# EAGLE board tube_power-OLD (EAGLE 6.4)
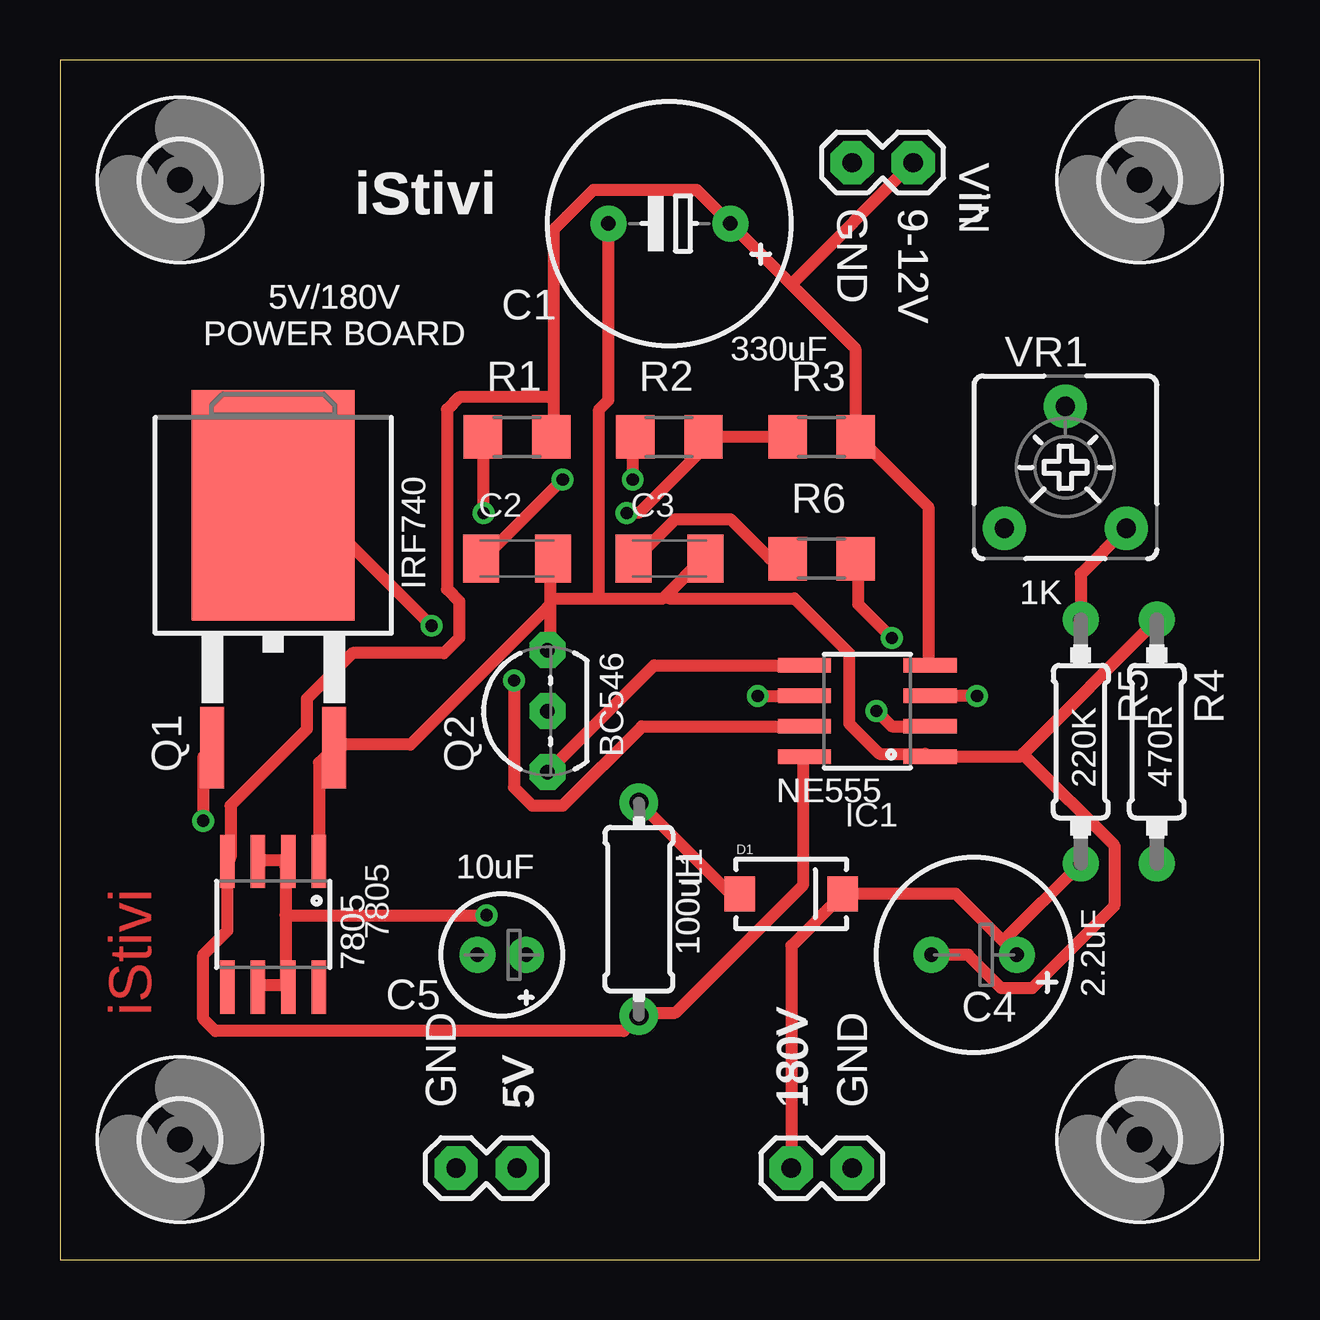
[diagram p0: board, top side]
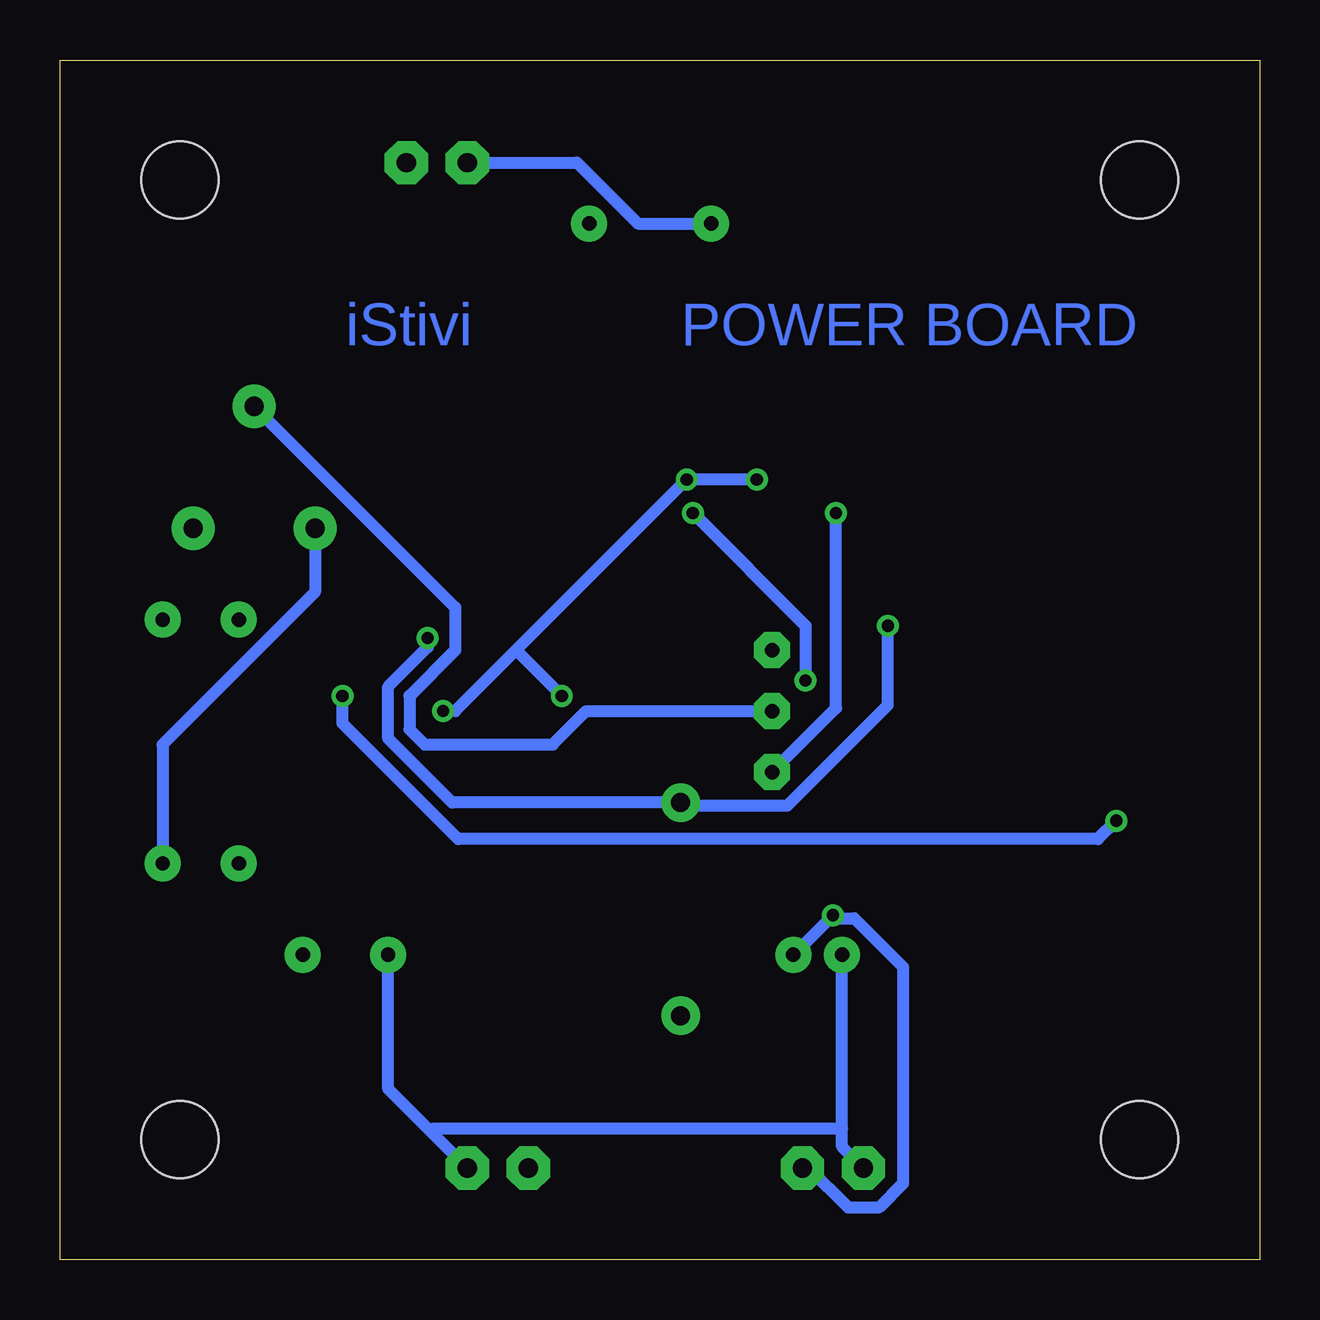
[diagram p1: board, bottom side, seen from below]

Size 50 x 50 mm. Coordinates in mm from the lower left corner, seen from the top.
Outline: 0,0 50,0 50,50 0,50 0,0
Copper layers (1*16): Top 0.035mm / dielectric 1.5mm / Bottom 0.035mm
Design rules "default *": minimum track width 20mil, minimum drill 20mil, track to track 15mil, track to pad 15mil, pad to pad 15mil, via to via 15mil, smd to smd 8mil, copper to edge 40mil, drill to drill 8mil, minimum pad ring 10mil, minimum via ring 8mil, stop-mask expansion 4mil, vias tented up to drill 0mil, thermal gap 10mil
Net classes: 1 ground: width 0.356 mm; 2 power: width 0.356 mm

## Footprints (pad centres in the part's own frame; a part is rotated, then mirrored left to right if it is on the bottom)
1X02 = drill 0.8 pad 1.8 octagon: 1 0,0; 2 2.54,0
SO08 = smd 0.61 x 2.21: 1 -1.905,-2.616; 2 -0.635,-2.616; 3 0.635,-2.616; 4 1.905,-2.616; 5 1.905,2.616; 6 0.635,2.616; 7 -0.635,2.616; 8 -1.905,2.616
E5-10,5 = drill 0.6 pad 1.5: + -2.54,0; - 2.54,0
C1206K = smd 1.5 x 2: 1 -1.5,0; 2 1.5,0
E3,5-8 = drill 0.6 pad 1.5: + -1.778,0; - 1.778,0
E2-5 = drill 0.6 pad 1.5: + -1.016,0; - 1.016,0
SMA-DIODE = smd 1.27 x 1.47: A -2.15,0; C 2.15,0
TFI0307 = drill 0.8 pad 1.6: 1 -4.445,0; 2 4.445,0
TO263 = smd 1 x 3.4: 1 -2.54,-6.6; 2 2.54,-6.6 | smd 6.8 x 9.6: 3 0,3.5
TO92-EBC = drill 0.6 pad 1.5 octagon: B 0,-1.27; C -2.54,-1.27; E 2.54,-1.27
R1206 = smd 1.6 x 1.803: 1 -1.422,0; 2 1.422,0
0207/10 = drill 0.6 pad 1.5: 1 -5.08,0; 2 5.08,0
3,2 = hole 3.2: 0,0
CA6V = drill 0.8 pad 1.8: A -2.54,-2.54; E 2.54,-2.54; S 0,2.54

## Placement (x,y rotation side)
5V  [1X02]  19.05,3.81 180 top
180V  [1X02]  30.48,3.81 0 top
7805  78  [SO08]  8.89,13.97 180 top
C1  330uF  [E5-10,5]  25.4,43.18 180 top
C2  2n2  [C1206K]  19.05,29.21 0 top
C3  100pF  [C1206K]  25.4,29.21 0 top
C4  2.2uF  [E3,5-8]  38.1,12.7 180 top
C5  10uF  [E2-5]  18.41,12.7 180 top
D1  1N4007  [SMA-DIODE]  30.48,15.24 0 top
IC1  NE555D  [SO08]  33.66,22.86 90 top
L1  100uH  [TFI0307]  24.13,14.61 270 top
Q1  IRF740S  [TO263]  8.89,27.94 0 top
Q2  BC546  [TO92-EBC]  19.05,22.86 90 top
R1  56K  [R1206]  19.05,34.29 0 top
R2  10K  [R1206]  25.4,34.29 0 top
R3  1K  [R1206]  31.75,34.29 0 top
R4  470R  [0207/10]  45.72,21.59 270 top
R5  220K  [0207/10]  42.55,21.59 270 top
R6  2K2  [R1206]  31.75,29.21 0 top
U$1  [3,2]  45,45 0 top
U$2  [3,2]  45,5 0 top
U$3  [3,2]  5,5 0 top
U$4  [3,2]  5,45 0 top
VIN  [1X02]  35.56,45.72 180 top
VR1  1K  [CA6V]  41.91,33.02 0 top

## Library data of the parts
5V 180V VIN = iStivi - Header-Connector
7805 Q2 = iStivi - Transistor-FET-reg
C1-C5 D1 L1 R1-R6 VR1 = iStivi - RCLD
IC1 = iStivi - ICs
Q1 = iStivi - Transistor-FET
U$1-U$4 = iStivi - Board-Holes

## Nets
5V [power]: 5V.1 7805.2 7805.3 7805.6 7805.7 C5.+
180V [power]: 180V.1 C4.+ D1.C R5.2
GND [ground]: 5V.2 180V.2 7805.1 C1.- C2.2 C3.2 C4.- C5.- IC1.1 Q1.2 Q2.E R4.1 VIN.2
N$1: IC1.3 Q1.1
N$2: C3.1 R6.1
N$3: IC1.5 Q2.C R1.1
N$4: IC1.7 R2.2 R3.1
N$5: C2.1 IC1.2 IC1.6 R2.1
N$6: D1.A L1.1 Q1.3 R6.2
N$8: R5.1 VR1.E
N$9: R4.2 VR1.A
N$10: Q2.B VR1.S
N$26: 7805.4 C1.+ IC1.4 IC1.8 L1.2 R1.2 R3.2 VIN.1

## Tracks (layer width: path | path; a pad name or v marks a point on that pad's centre or on a via)
5V  (via drill 0.51)
  Top 0.508: 7805.6 8.26,11.43 9.53,11.43 7805.7 9.4,11.56 9.4,14.35 | 7805.3 8.26,16.64 9.53,16.64 7805.2 9.4,16.38 9.4,14.35 | v17.78,14.35 9.53,14.35 9.4,14.35
  Bottom 0.508: C5.+ v17.78,14.35 17.65,14.22 16.89,14.22 14.86,12.19 14.86,3.17 15.88,2.16 17.14,2.16 18.8,3.81 5V.1
180V
  Top 0.508: C4.+ 39.31,13.27 | 39.31,13.27 37.34,15.24 D1.C 32.51,15.11 30.48,13.08 180V.1 | R5.2 39.37,13.34 39.31,13.27
GND
  Top 0.508: R4.1 40.13,21.08 | 40.13,21.08 40.01,20.95 36.32,20.95 IC1.1 36.07,21.08 34.16,21.08 32.89,22.35 32.89,25.27 30.61,27.56 25.4,27.56 25.27,27.69 | 7805.1 10.79,16.64 10.79,20.7 Q1.2 11.56,21.46 14.61,21.46 20.32,27.18 20.45,27.18 | 20.45,27.18 20.45,25.53 Q2.E | 20.45,27.18 20.45,27.56 | 20.45,27.56 20.45,29.21 C2.2 | 25.27,27.69 25.15,27.56 22.48,27.56 | 25.27,27.69 26.8,29.21 C3.2 | 22.48,27.56 20.57,27.56 20.45,27.56 | C1.- 22.86,35.81 22.48,35.43 22.48,27.69 22.48,27.56 | C4.- 37.85,12.7 39.24,11.3 40.51,11.3 43.94,14.73 43.94,17.27 40.26,20.95 40.13,21.08
  Bottom 0.508: 17.4,5.46 17.4,4.7 5V.2 | 17.4,5.46 C5.- | C4.- 36.32,7.11 34.54,5.33 | 180V.2 34.54,5.33 | 17.4,5.46 17.53,5.46 34.42,5.46 34.54,5.33 | C1.- 25.91,43.18 28.45,45.72 VIN.2
N$1  (via drill 0.51)
  Top 0.508: v38.23,23.5 36.32,23.5 IC1.3 | v5.97,18.29 5.97,20.95 Q1.1
  Bottom 0.508: v38.23,23.5 38.23,22.35 33.4,17.53 6.73,17.53 v5.97,18.29
N$2
  Top 0.508: R6.1 30.23,29.21 29.59,29.21 27.94,30.86 25.65,30.86 24,29.21 C3.1
N$3  (via drill 0.51)
  Top 0.508: v17.65,31.11 17.65,34.29 R1.1 | Q2.C 24.77,24.77 30.99,24.77 IC1.5
  Bottom 0.508: v17.65,31.11 17.65,22.99 Q2.C
N$4  (via drill 0.51)
  Top 0.508: R3.1 30.23,34.29 26.92,34.29 R2.2 27.18,34.16 24.13,31.11 v23.62,31.11 | v18.92,24.13 18.92,19.68 19.68,18.92 20.95,18.92 24.26,22.23 30.99,22.23 IC1.7
  Bottom 0.508: v18.92,24.13 18.92,26.42 v23.62,31.11
N$5  (via drill 0.51)
  Top 0.508: v23.88,32.51 23.88,34.29 R2.1 | v20.95,32.51 17.65,29.21 C2.1 | v34.04,22.86 34.67,22.23 36.2,22.23 IC1.2 | v29.08,23.5 30.99,23.5 IC1.6
  Bottom 0.508: v20.95,32.51 v23.88,32.51 24,32.38 30.99,25.4 | v34.04,22.86 33.53,22.86 30.99,25.4 | v29.08,23.5 30.86,25.27 30.99,25.4
N$6  (via drill 0.51)
  Top 0.508: L1.1 27.94,15.24 D1.A | v34.67,25.91 33.27,27.3 33.27,29.21 R6.2 | v15.49,26.42 10.54,31.37 8.89,31.37 Q1.3
  Bottom 0.508: v34.67,25.91 34.67,25.53 36.32,23.88 36.32,21.72 33.66,19.05 L1.1 24,18.92 19.68,18.92 15.49,23.11 v15.49,26.42
N$8
  Top 0.508: R5.1 42.55,28.57 VR1.E
N$9
  Bottom 0.508: R4.2 45.72,21.46 39.37,27.81 VR1.A
N$10
  Bottom 0.508: Q2.B 28.07,22.86 29.46,21.46 34.8,21.46 35.43,22.1 35.43,23.5 33.53,25.4 33.53,27.18 VR1.S
N$26
  Top 0.508: IC1.8 30.99,20.95 30.99,15.62 25.65,10.29 24.26,10.29 L1.2 23.5,9.53 6.48,9.53 5.97,10.03 5.97,12.7 6.99,13.72 6.99,16.51 7805.4 7.11,16.76 7.11,18.92 10.29,22.1 10.29,23.37 12.19,25.27 16,25.27 16.64,25.91 16.64,27.43 16.13,27.94 16.13,35.43 16.64,35.94 20.45,35.94 20.57,35.94 | 20.57,35.94 20.57,42.93 22.23,44.58 26.54,44.58 C1.+ 28.07,43.05 30.48,40.64 | 20.57,35.94 20.57,34.29 R1.2 | 30.48,40.64 33.15,37.97 33.15,34.29 R3.2 33.4,34.16 36.2,31.37 36.2,24.77 IC1.4 | VIN.1 30.61,40.77 30.48,40.64

## Text on the board
Top: iStivi
Bottom: POWER BOARD | iStivi
tNames: iStivi | GND | 9-12V | 5V/180V / POWER BOARD | GND | GND
tSilk: Vin | iStivi | GND | 9-12V | 5V/180V / POWER BOARD | 330uF | IRF740 | 1K | BC546 | 220K | 470R | NE555 | 10uF | 2.2uF | 100uH | 7805 | GND | 5V | 180V | GND
_tplace: Vin | iStivi | GND | 9-12V | 5V/180V / POWER BOARD | 330uF | IRF740 | 1K | BC546 | 220K | 470R | NE555 | 10uF | 2.2uF | 100uH | 7805 | GND | 5V | 180V | GND